# Altium PCB ZYNQ7020_AD9364.PcbDoc (part 3 of 3)
Units mil, origin at the board's own origin, x right, y up, seen from the top; angles counter-clockwise.
Board outline 6000 x 4000 mil, 4 copper layers (Top Layer, Layer 1, Layer 2, Bottom Layer), stack 13.912 mil thick; 188 components, 275 nets, 1212 pads, 269 vias.
Unrouted connection lines stored in the file: 735.
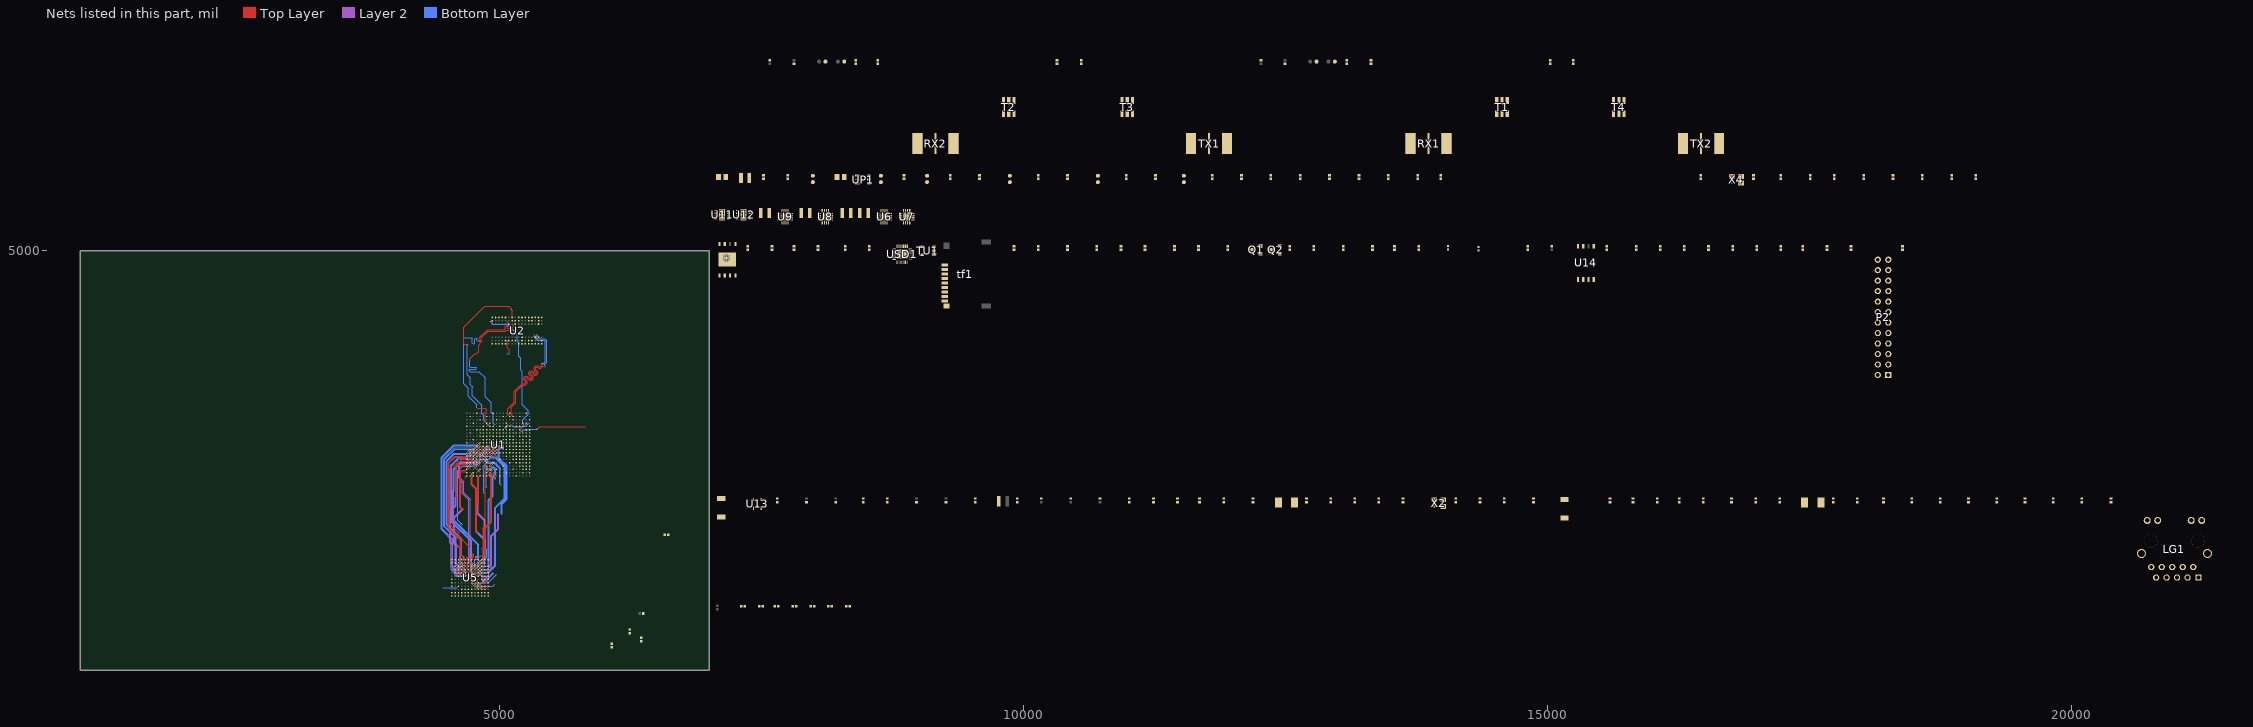
[diagram p4: the nets of this part, all layers, seen from the top]

## Via types
v1: diameter 17.72, hole 7.87, Top Layer to Bottom Layer, tented both sides, 129 vias
v2: diameter 16, hole 10, Top Layer to Bottom Layer, 124 vias
v3: diameter 19.68, hole 11.81, Top Layer to Bottom Layer, 16 vias

## Nets (pads, with @x,y where several pads share a name; then routed paths per layer and width w, separated by ;. In a path a pad name is that pad's centre, name@x,y a point inside that pad or via, vN(x,y) a via of type N, cw(c..) or ccw(c..) an arc to the next point about the centre after c; other vN are vias at no path point) (continued)
DDR3_DQS1_N: U1.F2 U2.B7 | length 1284.8
  Top Layer w6: U1.F2@5129.69,3419.29 5114.72,3434.26 5114.72,3506.84 5156.06,3548.18 5156.06,3654.47 5219.05,3717.47 5247.59,3717.47 5264.33,3734.2 5264.33,3754.87 5245.63,3773.57 5245.63,3782.43 5253.5,3790.3 5263.34,3790.3 5289.92,3763.73 5308.62,3763.73 5322.4,3777.51 5322.4,3797.19 5293.85,3825.73 5293.85,3836.56 5298.78,3841.48 5306.65,3841.48 5334.21,3813.92 5353.89,3813.92 5367.67,3827.7 5367.67,3845.42 5347,3866.09 5347,3885.77 5350.94,3889.71 5366.69,3889.71 5377.52,3878.88 5395.23,3878.88 5412.95,3896.6 v2@5429.68,3896.6 ; v2(5358.81,4191.88) 5358.81,4189.91 U2.B7@5373.58,4175.14
  Bottom Layer w6: v2(5358.81,4191.88) 5349.96,4183.02 5349.96,4175.14 5363.74,4161.36 5430.67,4161.36 5452.32,4139.71 5452.32,3934.99 5432.63,3915.3 v2@5432.63,3902.51
  other v2: 5431.65,3896.6
DDR3_DQS1_P: U1.G2 U2.C7 | length 1294.4
  Top Layer w6: U1.G2@5098.04,3419.29 5081.99,3435.34 5081.99,3493.79 5144.25,3556.05 5144.25,3659.4 5216.1,3731.25 5240.7,3731.25 5250.55,3741.09 5250.55,3749.95 5232.83,3767.66 5232.83,3790.3 5246.61,3804.08 5266.3,3804.08 5292.87,3777.51 5303.7,3777.51 5309.6,3783.41 5309.6,3790.3 5279.09,3820.81 5279.09,3839.51 5294.84,3855.26 5311.57,3855.26 5339.13,3827.7 5348.97,3827.7 5353.89,3832.62 5353.89,3841.48 5334.21,3861.17 5334.21,3890.7 5346.02,3902.51 5371.61,3902.51 5382.44,3891.68 5390.31,3891.68 5406.06,3907.43 v2(5406.06,3921.21) ; v2(5327.32,4191.88) 5327.32,4189.91 U2.C7@5342.08,4175.14
  Bottom Layer w6: v2@5330.27,4189.91 5338.15,4182.03 5338.15,4169.24 5359.8,4147.58 5425.74,4147.58 5439.52,4133.81 5439.52,3939.91 5420.82,3921.21 v2(5406.06,3921.21)
DDR3_ODT: U1.N5 U2.K1 | length 1706.2
  Top Layer w6: v2(4692.6,4103.06) 4668,4103.06 4658.15,4112.9 4658.15,4268.41 4860.91,4471.17 5091.22,4471.17 v2(5123.7,4438.69) 5121.74,4436.72 U2.K1@5121.74,4363.89 ; v2(4894.02,3338.48) 4894.34,3338.48 U1.N5@4907.91,3324.91
  Bottom Layer w6: v2@4693.59,4105.03 4694.57,4104.04 4694.57,3816.64 4722.13,3789.08 4722.13,3724.12 4743.78,3702.47 4743.43,3702.12 4743.43,3618.01 4833.98,3527.46 4833.98,3444.78 4848.75,3430.02 4848.75,3383.76 v2@4895.01,3337.5 ; v2@5123.7,4443.61 v2@5125.67,4441.64
DDR3_RAS: U1.P4 U2.J3 | length 1666.6
  Top Layer w6: v2(4783.88,3494.66) 4788.8,3499.58 4864.59,3499.58 4879.35,3484.82 4879.35,3477.93 4863.13,3458.17 4863.13,3373.17 U1.P4@4876.35,3356.03 ; v2(4829.19,4142.59) 4829.19,4169.16 4893.17,4233.14 5056.55,4233.14 5067.38,4243.97 5113.64,4243.97 5123.48,4253.81 v2(5123.48,4277.43) 5127.42,4277.43 U2.J3@5153.01,4303.02
  Bottom Layer w6: v2@4784.86,3495.64 4784.86,3532.06 4703.17,3613.75 4703.17,3685.86 4703.21,3685.89 4703.21,3686.88 4657.93,3732.15 4657.93,4160.3 4665.81,4168.18 4735.69,4168.18 4743.56,4160.3 4743.56,4119.95 4751.44,4112.08 4759.31,4112.08 4765.22,4117.98 4765.22,4159.32 4773.09,4167.19 4780.96,4167.19 4785.89,4162.27 4785.89,4148.49 4791.79,4142.59 v2@4825.26,4142.59 ; v2@5120.53,4277.43 v2@5123.48,4274.48
DDR3_RESET: R1.1 U1.B4 U2.T2 | length 1299.1
  Top Layer w6: v2(4907.89,4333.24) 4931.52,4333.24 U2.T2@4932.5,4334.23 ; v2(5239.59,3340.13) 5240.26,3340.13 U1.B4@5256.16,3356.03
  Bottom Layer w6: v2(4907.89,4333.24) 4941.36,4299.78 5071.28,4299.78 5169.7,4201.35 5169.7,4138.36 5184.22,4123.85 5184.22,3992.94 5204.15,3973 5204.15,3862.77 5218.92,3848 5218.92,3529.11 5276,3472.02 5276,3439.54 5224.57,3388.11 5224.57,3352.19 5236.63,3340.13 v2(5239.59,3340.13)
DDR3_VREF: C1.1 R4.1 R5.2 U1.H6 U1.P6 U2.H1 U2.M8
DDR3_WE: U1.M5 U2.L3 | length 1607.7
  Top Layer w6: v2(4717.97,3943.77) 4717.97,3969.36 4764.23,4015.62 4780.96,4015.62 4803.6,4038.26 4803.6,4098.3 4819.35,4114.04 4819.35,4127.82 4808.52,4138.65 4808.52,4169.16 4888.25,4248.89 5048.68,4248.89 5057.54,4257.74 5057.54,4278.41 5063.44,4284.32 5073.29,4284.32 5077.22,4280.38 5077.22,4262.67 5081.16,4258.73 5096.91,4258.73 5102.81,4264.63 5102.81,4290.23 5090.02,4303.02 5088.05,4303.02 v2(5074.27,4316.8) ; U1.M5@4939.56,3324.91 4941.48,3324.91 v2(4956.03,3339.47)
  Bottom Layer w6: v2@4718.96,3940.82 4718.96,3892.59 4723.88,3887.67 4775.06,3887.67 4779.98,3882.74 4779.98,3872.9 4775.06,3867.98 4718.96,3867.98 4715.02,3864.04 4715.02,3856.17 4722.89,3848.3 4804.59,3848.3 4864.63,3788.26 4864.63,3687.86 4864.5,3687.73 4864.5,3608.17 4924.54,3548.13 4924.54,3479.22 4924.28,3478.97 4924.28,3457.83 4941.27,3440.84 4941.27,3408.35 4941.02,3408.1 4941.02,3355.47 v2@4954.06,3342.42
EN_AGC: U1.U14 U5.G5 | length 533.3
  Top Layer w5: U5.G5@4736.59,1832.91 v1(4752.34,1817.17) ; v1@4768.58,3025.36 U1.U14@4784.06,3040.84
  Bottom Layer w5: v1(4768.58,3025.19) 4768.81,3025.19 4785,3009 4785,2985.93 4793.93,2977 4805.53,2977 4814.93,2986.39 4814.93,2998.24 4825.68,3009 4867.22,3009 4874.22,3002 4882,3002 4896.01,2987.99 4896.01,2987.94 4897.45,2986.5 4950.5,2986.5 4951.98,2985.02 5010,2927 5010,2774 5015,2769
ENABLE: U1.V15 U5.G6 | length 1398.3
  Top Layer w5: U5.G6@4736.09,1864.43 4720,1880.52 4720,2056.38 4717,2059.38 4717,2172.92 4617,2272.92 4617,2303 4533,2387 4533,2923.44 4579,2969.44 4589.56,2969.44 4614,2993.87 4737.08,2993.87 U1.V15@4752.56,3009.35
ETH_MDC: U1.C10
ETH_MDIO: R34.2 U1.C11
ETH_RXCK: U1.B17
ETH_RXCTL: R36.2 U1.D13
ETH_RXD0: R41.1 U1.D11
ETH_RXD1: R39.1 U1.A16
ETH_RXD2: R43.1 U1.F15
ETH_RXD3: R45.1 U1.A15
ETH_TXCK: U1.A19
ETH_TXCTL: U1.F14
ETH_TXD0: U1.E14
ETH_TXD1: U1.B18
ETH_TXD2: U1.D10
ETH_TXD3: U1.A17
FB_CLK_N: RX22.2 U1.U17 U5.G10 | length 1243.5
  Top Layer w5: U5.G10@4736.09,1990.42 v1(4751.83,2006.17) ; v1@4768.58,2930.88 U1.U17@4784.06,2946.36
  Layer 2 w5: v1(4751.83,2006.17) 4720.34,2037.66 4720.34,2052 4719.84,2052.49 4719.84,2628.3 4658.07,2690.07 4658.07,2797.93 4622,2834 4622,2958 4648,2984 4739.68,2984 4768.59,2955.08 v1(4768.58,2930.71)
FB_CLK_P: U1.T16 U5.F10 | length 1264.1
  Top Layer w5: v1(4688.85,2006.14) U5.F10@4704.59,1990.42 ; v1(4800.07,2962.14) 4800.07,2962.34 U1.T16@4815.55,2977.83
  Layer 2 w5: v1(4688.85,2006.14) 4709.35,2026.63 4709.35,2053.15 4709.84,2053.65 4709.84,2624.16 4648.07,2685.93 4648.07,2793.79 4612,2829.86 4612,2962.14 4643.86,2994 4743.82,2994 4775.66,2962.16 v1@4800.05,2962.16
FPGA_DONE: Q1.1 U1.R11 | length 21.9
  Top Layer w14: v1@4831.57,3120.03 U1.R11@4847.05,3135.51
  other v1: 4831.57,3119.85
FPGA_TCK: P2.10 U1.F9
FPGA_TDI: P2.8 U1.G6
FPGA_TDO: P2.7 U1.F6
FPGA_TMS: P2.9 U1.J6
GND: *.4 *.9 C1.2 C109.1 C110.1 C111.2 C112.2 C113.1 C114.1 C115.1 C116.1 C117.2 C118.2 C119.1 C120.2 C121.1 C122.2 C123.2 C124.2 C125.2 C126.2 C127.1 C128.1 C129.2 C130.1 C131.1 C132.2 C133.2 C134.2 C135.2 C136.2 C137.2 C138.2 C139.2 C140.1 C141.2 LG1.12 LG1.P10 LG1.SHIELD0 LG1.SHIELD1 P2.3 P2.5 P2.18 P2.19 P2.20 P2.21 P2.22 P2.23 P2.24 Q1.2 Q2.2 R1.2 R2.1 R5.1 R6.2 R26.2 R28.2 R36.1 R40.1 R44.2 R49.1 R51.1 R53.1 R54.2 R56.1 R62.1 R65.2 R69.2 RESET.1 RX6.2 RX7.2 RX8.2 RX13.2 RX14.2 RX15.2 tf1.6 tf1.10 TU1.2 U1.A8 U1.A18 U1.B1 U1.B11 U1.C4 U1.C9 U1.C14 U1.D17 U1.E10 U1.E20 U1.F3 U1.F7 U1.F10 U1.G10 U1.G12 U1.G16 U1.H7 U1.H9 U1.H11 U1.H13 U1.H19 U1.J2 U1.J8 U1.J10 U1.J12 U1.K5 U1.K7 U1.K10 U1.K11 U1.K13 U1.K15 U1.L8 U1.L9 U1.L12 U1.L18 U1.M1 U1.M7 U1.M9 U1.M10 U1.M11 U1.M13 U1.N4 U1.N8 U1.N10 U1.N12 U1.N14 U1.P7 U1.P9 U1.P11 U1.P13 U1.P17 U1.R8 U1.R12 U1.R20 U1.T3 U1.T7 U1.T13 U1.U6 U1.U16 U1.V9 U1.V19 U1.W2 U1.W12 U1.Y5 U1.Y15 U2.A9 U2.B1 U2.B3 U2.B9 U2.D1 U2.D8 U2.E1 U2.E2 U2.E8 U2.F9 U2.G1 U2.G8 U2.G9 U2.J2 U2.J8 U2.M1 U2.M9 U2.P1 U2.P9 U2.T1 U2.T9 U6.6 U6.7 U6.8 U6.15 U6.16 U6.20 U7.6 U7.7 U7.8 U7.15 U7.16 U7.20 U8.6 U8.7 U8.8 U8.15 U8.16 U8.20 U9.6 U9.7 U9.8 U9.15 U9.16 U9.20 U13.1 U14.4 USD1.2 USD1.11 USD1.25 USR_BTN.1 X2.2 | length 321.4
  Top Layer w14: v1(4634,3009) 4689.04,3009 U1.Y15@4689.57,3009.53 ; v1@4705.58,3088.54 U1.W12@4721.06,3104.02 ; v1(4737.08,2866.06) 4737.08,2867.07 4752.56,2882.55 U1.V19@4752.56,2883.54 ; v1@4800.07,3056.86 U1.T13@4815.55,3072.34 ; v1@4831.57,3088.54 U1.R12@4847.05,3104.02 ; v1@4863.06,2931.06 U1.P17@4878.54,2946.54 ; v1@4863.06,3120.03 U1.P11@4878.54,3135.51 ; v1(4863.22,3056.7) 4863.22,3057.2 U1.P13@4878.54,3072.52 ; v1@4894.56,3025.54 U1.N14@4910.04,3041.02 ; v1(4894.72,3088.2) 4894.72,3088.7 U1.N12@4910.04,3104.02 ; v1@4926.06,3057.04 U1.M13@4941.54,3072.52 ; v1(4926.21,3119.64) 4926.21,3120.18 U1.M11@4941.54,3135.51 ; v1@4957.55,3088.54 U1.L12@4973.03,3104.02
  other v1: 4863.06,2930.88 4894.56,3025.36 4800.07,3056.69 4926.06,3056.86 4705.58,3088.36 4831.57,3088.36 4957.55,3088.36 4863.06,3119.85
NetC6_2: U6.9
NetC7_2: U7.9
NetC11_2: U8.9
NetC13_2: U9.9
NetC19_1: U11.3
NetC24_1: U12.3
NetC27_2: U11.6
NetC28_2: U12.6
NetC111_1: C111.1 C112.1 LG1.P1
NetC117_1: C117.1 X1.1
NetC118_1: C118.1 X1.2
NetC119_2: C119.2 R28.1 R29.1 U1.E11
NetC122_1: C122.1 X3.1
NetC123_1: C123.1 X3.2
NetC129_1: C129.1
NetC135_1: C135.1 C136.1 R64.1
NetC142_1: C142.1 R73.2
NetC145_2: C145.2 R74.1
NetC146_2: C146.2 R73.1 U5.G2 U5.G3
NetC150_2: C150.2 C152.1 U5.M12
NetC151_2: C151.2 R74.2 U5.A11 U5.B11
NetC152_2: C152.2 X4.3
NetCP2_2: CP2.2 RP1.1 RP2.2 UP1.6
NetDONE_2: DONE.2 R61.2
NetL1_1: L1.1 U6.1 U6.2 U6.3
NetL2_1: L2.1 U7.1 U7.2 U7.3
NetL3_1: L3.1 U8.1 U8.2 U8.3
NetL4_1: L4.1 U9.1 U9.2 U9.3
NetLG1_11: LG1.11 R32.2
NetLG1_13: LG1.13 R31.2
NetLP1_1: LP1.1 UP1.3
NetP2_2: P2.2 R52.1 R54.1
NetP2_4: P2.4 R48.2 R50.1
NetQ1_3: Q1.3 R61.1
NetQ2_3: Q2.3 R60.1
NetR2_2: R2.2 U1.H5 | length 61
  Top Layer w6: U1.H5@5066.17,3324.91 5066.17,3325.58 v2(5081.03,3340.45)
  Bottom Layer w12: 5057.41,3307.97 5057.41,3313.88 v2@5081.03,3337.5
NetR3_2: R3.2 U1.G5 | length 214.3
  Top Layer w6: U1.G5@5097.82,3324.91 5097.97,3324.91 v2(5113.51,3340.45)
  Bottom Layer w6: v2(5113.51,3340.45) 5113.51,3338.48 5130.24,3321.75 5219.57,3321.75 5221.84,3324.02 5251.61,3324.02 5275.91,3348.32 5275.91,3358.17
NetR6_1: R6.1 U2.L8 | length 161.3
  Top Layer w6: U2.L8@5090,4142.5 5087.05,4142.5 5075.24,4130.69 5075.24,4072.62 5093.94,4053.92 v2(5093.94,4020.46)
  Bottom Layer w6: 5068.35,4018.49 v2@5091.97,4018.49
NetR9_2: U6.5
NetR10_2: U7.5
NetR14_2: U8.5
NetR15_2: U9.4
NetR16_2: U9.5
NetR26_1: R26.1
NetR27_1: R27.1
NetR30_2: R30.2 U1.B10
NetR37_2: R37.2 X2.3
NetR38_2: R38.2
NetR42_2: R42.2
NetR44_1: R44.1
NetR55_2: R55.2 U1.R10
NetR57_2: R57.2 U1.L6
NetR60_2: R60.2 USR_LED.2
NetR62_2: R62.2 USD1.24
NetR63_2: R63.2 tf1.3 USD1.20
NetR67_2: R67.2 TU1.1
NetR68_1: R68.1 TU1.3
NetR70_1: R70.1 tf1.9
NetR72_1: R72.1 USD1.9
NetR75_1: R75.1 U5.L4 | length 22.3
  Top Layer w12: U5.L4@4862.06,1801.47 v1(4877.81,1785.72)
NetRESET_2: RESET.2 U13.3
NetRX1_1: RX1.1 T1.3
NetRX2_1: RX2.1 T2.3
NetT3_3: T3.3 TX1.1
NetT4_3: T4.3 TX2.1
Nettf1_1: tf1.1 USD1.23
Nettf1_2: tf1.2 USD1.22
Nettf1_5: tf1.5 USD1.19
Nettf1_7: tf1.7 USD1.18
Nettf1_8: tf1.8 USD1.16
OTG_CLK: R42.1 U1.A11
OTG_DATA0: U1.A14
OTG_DATA1: U1.D15
OTG_DATA2: U1.A12
OTG_DATA3: U1.F12
OTG_DATA4: U1.C16
OTG_DATA5: U1.A10
OTG_DATA6: U1.E13
OTG_DATA7: U1.C18
OTG_DIR: U1.C13
OTG_NXT: U1.E16
OTG_RESETN: C121.2 R33.1 U1.D16
OTG_STP: U1.C15
PG_1V0: U6.4 U7.13
PG_1V5: U8.4 U9.13
PG_1V8: U7.4 U8.13
PHY_AD0/LED0: R31.1 R46.2
PHY_AD1/LED1: R32.1 R40.2
PHY_MDI0_N: LG1.P3
PHY_MDI0_P: LG1.P2
PHY_MDI1_N: LG1.P7
PHY_MDI1_P: LG1.P4
PHY_MDI2_N: LG1.P6
PHY_MDI2_P: LG1.P5
PHY_MDI3_N: LG1.P9
PHY_MDI3_P: LG1.P8
PMEB: R35.2
PS_CLK_500: R37.1 U1.E7
PS_MIO7: R56.2 U1.D8
PS_MIO8: R47.2 U1.D5 | length 685.1
  Top Layer w6: U1.D5@5192.77,3324.91 5208.98,3308.7 v2@5208.98,3277.46 ; v2@5362.53,3298.13 v2(5362.53,3299.11) 5385.32,3321.91 5820.05,3321.91
  Bottom Layer w6: v2(5208.98,3279.02) 5217.85,3279.02 5233.85,3295.02 5247.11,3295.02 5249.91,3292.22 5297.57,3292.22 5301.5,3296.16 v2@5362.53,3296.16
PS_PRO_B: U1.C7 U13.2
QSPI_CS: *.1 R59.1 U1.A7 U14.1
QSPI_D0: *.5 R49.2 U1.B8 U14.5
QSPI_D1: *.2 R51.2 U1.D6 U14.2
QSPI_D2: *.3 R52.2 U1.B7 U14.3
QSPI_D3: *.7 R50.2 U1.A6 U14.7
QSPI_SCK: R53.2 R58.2 U1.A5
REG_OUT: L6.1
RFGND: C14.2 C15.2 C58.2 C59.1 C60.2 C63.1 C142.2 C143.1 C144.1 C145.1 C146.1 C150.1 C151.1 C162.2 C165.2 C166.2 C168.2 C169.2 C170.2 C171.2 C172.2 C173.2 C174.2 C175.2 C176.2 C177.2 CP1.1 CP3.1 R75.2 RP1.2 RX1.2 RX1.3 RX1.4 RX1.5 RX2.2 RX2.3 RX2.4 RX2.5 RX5.1 RX6.1 RX7.1 RX8.1 RX10.1 RX13.1 RX14.1 RX15.1 RX22.1 T1.1 T1.2 T1.5 T2.1 T2.2 T2.5 T3.1 T3.2 T3.5 T4.1 T4.2 T4.5 TX1.2 TX1.3 TX1.4 TX1.5 TX2.2 TX2.3 TX2.4 TX2.5 U5.A1 U5.A2 U5.A4 U5.A5 U5.A6 U5.A12 U5.B1 U5.B2 U5.B12 U5.C1 U5.C2 U5.C7 U5.C8 U5.C9 U5.C10 U5.C11 U5.C12 U5.D1 U5.D12 U5.E1 U5.F1 U5.F3 U5.F7 U5.F9 U5.F11 U5.G1 U5.G12 U5.H2 U5.H3 U5.H5 U5.H6 U5.H7 U5.H10 U5.J2 U5.K1 U5.K2 U5.K12 U5.L1 U5.L2 U5.L3 U5.L7 U5.L8 U5.L9 U5.L10 U5.L11 U5.L12 U5.M4 U5.M5 U5.M6 U11.0 U11.4 U12.0 U12.4 UP1.2 X4.2 | length 299.8
  Top Layer w12: v1(4594.36,1911.65) U5.C7@4610.1,1895.93 ; v1(4594.36,1943.14) U5.C8@4610.1,1927.42 ; v1(4595,1974) U5.C9@4610.1,1958.92 ; v1(4641.1,2073.89) 4641.35,2073.64 4641.35,2053.66 U5.D12@4641.6,2053.41 ; v1(4688.84,1911.68) U5.F7@4704.59,1895.93 ; v1(4688.84,1974.67) U5.F9@4704.59,1958.92 ; v1(4688.85,2037.63) U5.F11@4704.59,2021.91 ; U5.G12@4736.09,2053.41 4736.09,2065.09 4750,2079 v1(4750,2105) ; U5.H5@4767.58,1832.94 v1(4783.33,1817.19) ; U5.H6@4767.58,1864.43 v1(4783.33,1848.68) ; U5.H7@4767.58,1895.93 v1(4783.33,1911.68) ; U5.H10@4767.58,1990.42 v1(4783.33,2006.17)
  other v3: 7112.2,5306.61 7137.8,5306.61 7317.2,5306.61 7342.8,5306.61 7112.2,5332.2 7137.8,5332.2 7317.2,5332.2 7342.8,5332.2 7112.2,5357.8 7137.8,5357.8 7317.2,5357.8 7342.8,5357.8 7112.2,5383.39 7137.8,5383.39 7317.2,5383.39 7342.8,5383.39
RX1A_N: C16.2 U5.M2
RX1A_P: C30.2 U5.M1
RX1AN_N: C16.1 T1.6
RX1AN_P: C30.1 T1.4
RX1B_N: C29.2 U5.J1
RX1B_P: C31.2 U5.H1
RX1BN_N: C29.1 T2.6
RX1BN_P: C31.1 T2.4
RX_D0_N: U1.P20 U5.K11 | length 933.6
  Top Layer w5: U5.K11@4830.58,2021.91 4846.58,2037.91 4846.58,2088.53 4865.09,2107.03 4865.09,2350.09 4927,2412 4927,2858 4919,2866 4900,2866 4892,2858 4886.87,2858 4880.92,2852.05 U1.P20@4878.54,2852.05
RX_D0_P: U1.N20 U5.J12 | length 856.4
  Top Layer w5: U5.J12@4799.08,2053.41 4800.26,2054.59 4800.26,2066.73 4824.09,2090.55 4834.46,2090.55 4855.09,2111.18 4855.09,2354.23 4917,2416.14 4917,2842.71 4910.04,2849.67 U1.N20@4910.04,2852.05
RX_D1_N: U1.W20 U5.K10 | length 969.6
  Top Layer w5: U1.W20@4721.06,2852.05 4731.81,2841.3 4731.81,2770.05 4769.93,2731.93 4775,2726.86 4775,2315.86 4785.93,2304.93 ; U5.K10@4830.58,1990.42 v1(4846.33,2006.17)
  Bottom Layer w5: 4782.14,2327 4785.07,2324.07 4869.46,2239.68 4869.46,2155.44 4877.58,2147.32 4877.58,2076.09 4846.33,2044.84 v1(4846.33,2006.17)
RX_D1_P: U1.V20 U5.J11 | length 919.7
  Top Layer w5: U1.V20@4752.56,2852.05 4741.81,2841.3 4741.81,2774.19 4785,2731 4785,2320 4793,2312 ; U5.J11@4799.08,2021.91 4814.58,2037.43 v1(4814.94,2037.45)
  Bottom Layer w5: 4778,2317 4859.46,2235.54 4859.46,2155.44 4845.94,2141.91 4845.94,2068.45 v1(4814.94,2037.45)
RX_D2_N: U1.U20 U5.K9 | length 967
  Top Layer w5: U1.U20@4784.06,2852.05 4794.81,2841.31 4794.81,2577 ; U5.K9@4830.58,1958.92 4831.04,1958.92 4846.33,1974.21 v1(4846.33,1974.29)
  Layer 2 w5: 4789,2600 4798.07,2590.93 4798.07,2497.07 4865.54,2429.6 4865.54,2048.88 4862.34,2045.68 4862.34,1990.3 v1(4846.33,1974.29)
RX_D2_P: U1.T20 U5.J10 | length 947.1
  Top Layer w5: U5.J10@4799.08,1990.95 4814.83,2006.69 v1(4814.94,2006.69) ; 4804.81,2577 4804.81,2841.31 U1.T20@4815.55,2852.05
  Layer 2 w5: 4781.93,2592.93 4788.07,2586.79 4788.07,2492.93 4791,2490 4855.54,2425.46 4855.54,2053.28 4852.61,2050.36 4852.34,2050.36 4852.34,2024.45 4849.42,2021.53 4829.77,2021.53 v1(4814.94,2006.69)
RX_D3_N: U1.P19 U5.K8 | length 1181.5
  Top Layer w5: U5.K8@4830.58,1927.42 v1(4846.33,1943.17) ; U1.P19@4878.54,2883.54 4878.54,2884.04 4894,2899.5 v1(4894,2900)
  Bottom Layer w5: v1(4846.33,1943.17) 4862.34,1959.18 4883.94,1959.18 4903.34,1978.58 4903.34,2620.74 4942.14,2659.54 4942.14,2840.78 4965.5,2864.14 4965.5,2917.21 4944.71,2938 4930,2938 4917.76,2925.76 4915.7,2925.76 4905.75,2915.8 4905.75,2908.14 4902.82,2905.21 4902.65,2905.21 4897.44,2900 v1(4894,2900)
RX_D3_P: U1.N18 U5.J9 | length 1148.4
  Top Layer w5: U5.J9@4799.08,1958.92 4814.83,1974.66 v1(4814.94,1974.66) ; U1.N18@4910.04,2915.04 4910.95,2915.04 4925.09,2900.9 v1(4926,2900.9)
  Bottom Layer w5: v1(4814.94,1974.66) 4830.45,1990.18 4889.07,1990.18 4893.34,1994.45 4893.34,2624.88 4932.14,2663.68 4932.14,2844.93 4956,2868.78 4956,2869.5 4955.5,2870 4955.5,2913.07 4940.57,2928 4934.14,2928 4923.4,2917.26 4919.22,2917.26 4914.25,2912.28 4914.25,2908.14 4917.18,2905.21 4918.25,2905.21 4922.56,2900.9 v1(4926,2900.9)
RX_D4_N: U1.T15 U5.K7 | length 1677.5
  Top Layer w5: v1@4800.07,2993.87 U1.T15@4815.55,3009.35 ; U5.K7@4830.58,1896.45 v1(4846.33,1912.2)
  Layer 2 w5: v1(4846.33,1912.2) 4861.86,1927.73 4883.6,1927.73 4920.34,1964.48 4920.34,1981.35 4928.09,1989.09 4928.09,2275 4995,2341.91 4995,2490
  Bottom Layer w5: v1(4800.07,2993.7) 4800.07,2996.23 4816.71,3012.87 4816.71,3033.16 4826.4,3042.85 4836.88,3042.85 4847.29,3053.26 4847.29,3061.79 4857.65,3072.15 4867.86,3072.15 4878.2,3082.49 4878.2,3094.65 4888.54,3104.99 4900.71,3104.99 4910.36,3114.64 4910.36,3124.86 4922.93,3137.43 4976.57,3137.43 4983,3131 4988,3126 4988,3018.33 5063.5,2942.83 5063.5,2632.3 5016,2584.8 5016,2491.86 5021.86,2486 5026,2486
RX_D4_P: U1.T14 U5.J8 | length 1663.6
  Top Layer w5: U5.J8@4799.08,1927.95 4814.83,1943.69 v1(4814.94,1943.69) ; v1@4800.07,3025.36 U1.T14@4815.55,3040.84
  Layer 2 w5: v1(4814.94,1943.69) 4829.8,1958.55 4883.4,1958.55 4918.09,1993.24 4918.09,2279.14 4985,2346.06 4985,2490
  Bottom Layer w5: v1(4800.07,3025.19) 4800.07,3027.83 4806.71,3034.47 4806.71,3038.39 4815.86,3047.55 4815.86,3063.86 4824.57,3072.57 4840.35,3072.57 4848.2,3080.41 4848.2,3094.52 4856.9,3103.22 4871.01,3103.22 4879.7,3111.91 4879.7,3126.01 4894.69,3141 4912.36,3141 4918.79,3147.43 4980.71,3147.43 4998,3130.14 4998,3021.77 4998.51,3021.26 4999.21,3021.26 5073.5,2946.98 5073.5,2628.16 5026,2580.66 5026,2496
RX_D5_N: U1.R14 U5.J7 | length 1505.6
  Top Layer w5: U5.J7@4799.58,1896.45 v1(4815.33,1912.2) ; v1@4831.57,3025.36 U1.R14@4847.05,3040.84
  Bottom Layer w5: v1(4815.33,1912.2) 4830.82,1896.7 4883.6,1896.7 4897.22,1910.32 4897.22,1928.08 4965.57,1996.44 4965.57,2546.4 5055,2635.82 5055,2939.31 4979.5,3014.81 4979.5,3017.64 4963.14,3034.01 4916.2,3034.01 4915.02,3035.19 4909.42,3035.19 4904.38,3040.22 4846.6,3040.22 v1(4831.57,3025.19)
RX_D5_P: U1.P14 U5.H8 | length 1456.4
  Top Layer w5: U5.H8@4768.08,1927.95 v1(4783.83,1943.69) ; v1@4863.06,3025.36 U1.P14@4878.54,3040.84
  Bottom Layer w5: v1(4783.83,1943.69) 4799.82,1927.7 4882.7,1927.7 4955.57,2000.58 4955.57,2550.54 5045,2639.96 5045,2935.17 4969.5,3010.67 4969.5,3013.5 4958.99,3024.01 4914.21,3024.01 4900.71,3010.5 4877.74,3010.5 v1(4863.06,3025.19)
RX_FRAME_N: U1.V13 U5.G7 | length 1448.6
  Top Layer w5: U5.G7@4735.58,1895.45 v1@4751.33,1911.2 ; v1@4737.08,3056.86 U1.V13@4752.56,3072.34
  Bottom Layer w5: v1(4737.08,3056.69) 4737.08,3054.06 4722.22,3039.2 4722.22,3027.13 4709.61,3014.53 4696.47,3014.53 4677,3034 4674,3037 4618.86,3037 4538,2956.14 4538,2650 4537,2649 4537,2417.32 4726,2228.32 4726,1933.88 4736.18,1923.7 4742.84,1923.7 4745.77,1920.77 4745.77,1920.7 4750.58,1915.89 v1(4750.58,1912.45)
RX_FRAME_P: U1.U13 U5.G8 | length 1458.7
  Top Layer w5: U5.G8@4735.58,1926.95 v1@4751.33,1942.69 ; v1@4768.58,3056.86 U1.U13@4784.06,3072.34
  Bottom Layer w5: v1@4751.33,1942.69 4751.33,1939.76 4746.77,1935.2 4746.77,1935.13 4743.84,1932.2 4739.7,1932.2 4734.5,1937.4 4734.5,1951.86 4736,1953.36 4736,2097.99 4735.14,2098.85 4735.14,2164.72 4736,2165.58 4736,2232.46 4547,2421.46 4547,2644.86 4548,2645.86 4548,2952 4623,3027 4659.93,3027 4660,3026.93 4669.93,3026.93 4692.33,3004.53 4737.26,3004.53 4751.94,3019.21 4751.94,3040.04 v1(4768.58,3056.69)
  other v1: 4751.58,1943.45
SD_CD: R70.2 R71.1 U1.B14
SD_CLK: R72.2 U1.D14
SD_CMD: U1.C17 USD1.4
SD_D0: U1.E12 USD1.6
SD_D1: U1.A9 USD1.7
SD_D2: U1.F13 USD1.1
SD_D3: U1.B15 USD1.3
SPI_CLK: U1.P18 U5.J5 | length 989.3
  Top Layer w5: U5.J5@4799.08,1833.93 4799.08,1833.42 v1(4815.69,1816.81) ; 4827,2155 4845.03,2173.03 4845.03,2356.19 4863.06,2374.22 4863.06,2899.38 U1.P18@4878.54,2914.86
  Layer 2 w5: v1(4815.69,1816.81) 4815.69,1819.05 4830.82,1834.18 4850.1,1834.18 4862.34,1846.42 4862.34,1862.69 4881.57,1881.92 4891.57,1881.92 4941.34,1931.69
SPI_DI: U1.P15 U5.J4 | length 518
  Top Layer w5: U5.J4@4800.07,1801.43 4800.07,1801.29 4815.3,1786.06 v1(4815.66,1786.06) ; v1(4862.35,2992.86) v1@4863.37,2993.87 ; v1@4863.38,2993.87 4878.54,3009.03 U1.P15@4878.54,3009.35
  Layer 2 w5: v1(4815.66,1786.06) 4816.2,1786.06 4831.57,1801.43 4942.04,1801.43 4958.14,1817.53
  Bottom Layer w5: v1(4862.35,2992.86) 4863.9,2992.86 4865.82,2990.94 4878.06,2990.94 4894,2975 4917.67,2975 4920.67,2978 4946,2978 5001.5,2922.5 5001.5,2776
SPI_DO: U1.P16 U5.L6 | length 434
  Top Layer w5: U5.L6@4862.07,1865.43 4878.08,1849.42 v1(4878.08,1848.79) ; v1@4863.06,2962.37 U1.P16@4878.54,2977.85
  Bottom Layer w5: 4855,2688 4851,2692 4851,2914 4847,2918 4847,2946.14 v1(4863.06,2962.2) ; v1(4878.08,1848.79) 4879.34,1850.05 4879.34,1858.69 4946.01,1925.36
SPI_ENB: U1.N17 U5.K6 | length 309.9
  Top Layer w5: U5.K6@4830.58,1865.43 4830.58,1865.17 4844.85,1850.9 v1(4845.1,1850.9) ; v1@4894.56,2930.88 U1.N17@4910.04,2946.36
  Layer 2 w5: v1(4845.1,1850.9) 4846.32,1852.12 4846.32,1884.16 4854.59,1892.43 4879.84,1892.43
  Bottom Layer w5: 4879,2743 4876,2746 4876,2912.15 v1(4894.56,2930.71)
TEST/ENABLE: RX5.2 U5.C4 | length 156.9
  Top Layer w5: v1(4594.09,1785.43) U5.C4@4609.84,1801.18
  Bottom Layer w5: 4459.42,1785.43 v1(4594.09,1785.43)
TX1A_N: C48.1 L9.2 U5.M8
TX1A_P: C40.1 L8.2 U5.M7
TX1B_N: C47.1 L7.2 U5.M10
TX1B_P: C32.1 L5.2 U5.M9
TX1BN_N: C47.2 C48.2 T3.6 T4.6
TX1BN_P: C32.2 C40.2 T3.4 T4.4
TX_D0_N: U1.T10 U5.E7 | length 1729.7
  Top Layer w5: v1(4657.59,1911.82) 4657.59,1911.62 4673.09,1896.11 U5.E7@4673.1,1895.93 ; v1@4800.07,3151.53 U1.T10@4815.55,3167.01
  Bottom Layer w5: v1(4657.59,1911.82) 4657.44,1911.67 4657.35,1911.67 4641.85,1896.18 4587.34,1896.18 4575.68,1907.83 4575.68,1924.83 4543.34,1957.18 4543.34,2245.66 4456,2333 4445.43,2343.57 4445.43,2489.57 4444,2491 4444,3028.14 4566.82,3150.97 4774.1,3150.97 4784.57,3140.5 4791.93,3140.5 4800.07,3148.63 v1(4800.07,3151.35)
TX_D0_P: U1.T11 U5.F8 | length 1709.2
  Top Layer w5: v1@4688.84,1943.17 U5.F8@4704.59,1927.42 ; v1@4800.07,3120.03 U1.T11@4815.55,3135.51
  Bottom Layer w5: v1@4688.84,1943.17 4672.85,1927.18 4631.24,1927.18 4630.9,1927.52 4618.59,1927.52 4618.25,1927.18 4587.48,1927.18 4553.34,1961.32 4553.34,2249.8 4455.43,2347.71 4455.43,2493.71 4454,2495.14 4454,3024 4570.97,3140.97 4769.96,3140.97 4780.43,3130.5 4791.72,3130.5 4800.07,3122.15 v1(4800.07,3119.85)
  other v1: 4688.59,1943.42
TX_D1_N: U1.Y17 U5.D7 | length 1342.2
  Top Layer w5: 4593,2649 4593,2937.28 4613,2957.28 4678.83,2957.28 U1.Y17@4689.57,2946.54 ; v1(4624.75,1911.14) 4626.88,1911.14 U5.D7@4642.09,1895.92
  Layer 2 w5: 4590.07,2645.93 4589.68,2645.54 4589.68,2569.18 4535.15,2514.65 4535.15,2219 4553,2201.15 4553,1994.05 4588.77,1958.28 4663.74,1958.28 4672.45,1949.57 4672.45,1905.66 4663.74,1896.96 4638.93,1896.96 v1(4624.75,1911.14)
TX_D1_P: U1.Y16 U5.E8 | length 1283.4
  Top Layer w5: 4583,2653 4583,2941.43 4608.86,2967.28 4678.83,2967.28 U1.Y16@4689.57,2978.03 ; v1@4657.84,1943.17 U5.E8@4673.59,1927.42
  Layer 2 w5: 4583,2653 4579.68,2649.68 4579.68,2573.32 4525.15,2518.79 4525.15,2214.86 4543,2197.01 4543,1989.91 4579.5,1953.41 4579.5,1936.98 4588.81,1927.68 4641.85,1927.68 v1(4657.59,1943.42)
TX_D2_N: U1.U12 U5.D8 | length 1534.3
  Top Layer w5: v1(4626.78,1942.53) 4626.78,1942.39 4641.61,1927.55 U5.D8@4641.6,1927.42 ; v1(4769.61,3089.4) 4769.61,3089.49 4784.06,3103.93 U1.U12@4784.06,3104.02
  Bottom Layer w5: v1(4626.78,1942.53) 4610.55,1958.76 4610.55,1982.86 4580.57,2012.84 4580.57,2164.48 4580.72,2164.63 4580.72,2260 4471,2369.72 4471,3016.14 4573.86,3119 4741.24,3119 4769.61,3090.63 v1(4769.61,3089.4)
TX_D2_P: U1.T12 U5.E9 | length 1553.5
  Top Layer w5: v1@4657.36,1974.64 U5.E9@4673.1,1958.92 ; v1@4800.07,3088.54 4800.16,3088.54 4815.55,3103.93 U1.T12@4815.55,3104.02
  Bottom Layer w5: 4622.43,1989.5 4618.05,1989.5 4590.57,2016.98 4590.57,2160.34 4590.72,2160.48 4590.72,2264.14 4481,2373.86 4481,3012 4578,3109 4737.1,3109 4742.88,3103.22 4743.23,3103.22 4751.94,3094.52 4751.94,3086.06 4763.46,3074.54 4784.05,3074.54 4797.87,3088.36 v1(4800.07,3088.36) ; 4622.43,1990 4641,1990 4656.36,1974.64 v1@4657.36,1974.64
  other v1: 4657.11,1973.89
TX_D3_N: U1.Y19 U5.D9 | length 1075.5
  Top Layer w5: v1(4625.91,1974.64) U5.D9@4641.6,1958.92 ; 4652.93,2545.07 4644.86,2545.07 4632.93,2557 4632.93,2890.31 4636.91,2894.29 4678.82,2894.29 U1.Y19@4689.57,2883.54
  Layer 2 w5: v1(4625.91,1974.64) 4594.26,2006.29 4594.26,2176.25 4564.81,2205.7 4564.81,2456.95 4652.93,2545.07
TX_D3_P: U1.Y18 U5.E10 | length 1077.8
  Top Layer w5: 4652.93,2535.07 4640.72,2535.07 4622.93,2552.86 4622.93,2894.45 4632.77,2904.29 4636.91,2904.29 4678.82,2904.29 U1.Y18@4689.57,2915.04 ; v1(4657.36,2006.14) U5.E10@4673.1,1990.42
  Layer 2 w5: v1(4657.36,2006.14) 4626.24,2037.26 4626.24,2159.1 4577.79,2207.55 4577.74,2207.55 4574.81,2210.48 4574.81,2452.81 4660,2538
TX_D4_N: U1.W13 U5.D10 | length 1340.9
  Top Layer w5: v1(4625.71,2005.51) 4626.1,2005.51 4641.19,1990.42 U5.D10@4641.6,1990.42 ; v1@4705.58,3056.86 U1.W13@4721.06,3072.34
  Bottom Layer w5: v1(4625.71,2005.51) 4625.84,2005.64 4625.84,2088.84 4632.5,2095.5 4632.5,2247.86 4494,2386.36 4494,2996.14 4565.86,3068 4691.79,3068 4703.11,3056.69 v1(4705.58,3056.69)
TX_D4_P: U1.V12 U5.E11 | length 1363
  Top Layer w5: v1@4658.33,2036.67 U5.E11@4673.1,2021.91 ; v1@4737.08,3088.54 U1.V12@4752.56,3104.02
  Bottom Layer w5: v1@4658.33,2036.67 4658.33,2079.67 4642.5,2095.5 4642.5,2252 4504,2390.5 4504,2992 4570,3058 4681.42,3058 4687,3052.42 4687,3051 4697,3041 4712,3041 4721.45,3050.45 4721.45,3072.65 4737.08,3088.27 v1(4737.08,3088.36)
  other v1: 4657.59,2038.42
TX_D5_N: U1.Y14 U5.D11 | length 1219
  Top Layer w5: U5.D11@4640.59,2022.42 4625.33,2037.68 4625.33,2238.43 4513,2350.76 4513,2979.91 4573.02,3039.93 4644.42,3039.93 4651.82,3032.53 4682.25,3032.53 4689.57,3039.85 U1.Y14@4689.57,3041.02
TX_D5_P: U1.W14 U5.E12 | length 1215.7
  Top Layer w5: U5.E12@4673.1,2053.41 4673.1,2054.18 4663.23,2064.05 4663.23,2072.77 4635.33,2100.67 4635.33,2242.57 4523,2354.9 4523,2975.76 4577.16,3029.93 4640.28,3029.93 4647.68,3022.53 4690.19,3022.53 4707,3039.34 4719.38,3039.34 U1.W14@4721.06,3041.02
TX_FRAME_N: RX10.2 U1.W16 U5.H9 | length 1285
  Top Layer w5: v1@4705.58,2962.37 U1.W16@4721.06,2977.85 ; U5.H9@4767.58,1958.92 v1(4783.33,1974.67)
  Bottom Layer w5: v1(4705.58,2962.2) 4708.09,2962.2 4716.33,2970.44 4716.33,2974.58 4712.35,2978.55 4698.8,2978.55 4687.32,2967.07 4620.07,2967.07 4568,2915 4568,2711.25 4566.5,2709.75 4566.5,2432.8 4801.72,2197.59 4801.72,2063.32 4799.09,2060.69 4799.09,2021.91 4799.34,2021.66 4799.34,1990.68 v1(4783.33,1974.67)
TX_FRAME_P: U1.V16 U5.G9 | length 1331
  Top Layer w5: U5.G9@4736.09,1958.92 v1(4751.83,1974.67) ; v1@4737.08,2962.37 U1.V16@4752.56,2977.85
  Bottom Layer w5: v1(4737.08,2962.2) 4734.57,2962.2 4726.33,2970.44 4726.33,2978.72 4716.5,2988.55 4694.66,2988.55 4683.18,2977.07 4615.93,2977.07 4558,2919.14 4558,2715.39 4556.5,2713.89 4556.5,2428.66 4791.72,2193.45 4791.72,2067.47 4783.27,2059.02 4776.17,2059.02 4767.34,2050.18 4767.34,1990.18 v1(4751.83,1974.67)
TXNRX: U1.U15 U5.H4 | length 1039
  Top Layer w5: U5.H4@4768.58,1801.43 4768.94,1801.43 4784.08,1786.29 v1(4784.94,1786.29) ; v1@4768.58,2993.87 U1.U15@4784.06,3009.35
  Bottom Layer w5: v1(4640,2390) 4603,2427 4603,2901 4648,2946 4744,2946 4768.58,2970.58 v1(4768.58,2993.7) ; v1(4784.94,1786.29) 4800.33,1801.69 4800.33,1823.75 4810.01,1833.43 4892.08,1833.43 4968,1909.35 4968,1913
UART_RX: P2.11 U1.C12
UART_TX: P2.12 U1.B12
USB2_5V: C137.1 P2.15 R64.2 R66.1 R67.1
USB_ID: 
USB_OTG_N: P2.16
USB_OTG_P: P2.17
USB_VBUS: R66.2
USR_BTN: R19.2 U1.C5 USR_BTN.2
USR_LED: Q2.1 R65.1 U1.C8
VCC1P8: C143.2 C144.2 CP2.1 CP3.2 LP1.2 RP2.1 U5.H12 X4.4 | length 29.4
  Top Layer w10: U5.H12@4767.58,2053.41 4767.58,2054.49 4775.38,2062.29 4775.38,2077.52 v1@4775.76,2077.91
  Top Layer w12: v1@4775.76,2077.91 v1(4776.86,2079)
VCC_1V0: L1.2 U1.G7 U1.G11 U1.G13 U1.H10 U1.H12 U1.J7 U1.J13 U1.K12 U1.L7 U1.L13 U1.M12 U1.N7 U1.N13 U1.P8 U1.P12 U1.R7 U1.R13 U6.14 | length 110
  Top Layer w14: v1(4830.72,3057.71) 4831.73,3057.71 4846.54,3072.52 U1.R13@4847.05,3072.52 ; v1@4863.06,3088.54 U1.P12@4878.54,3104.02 ; v1@4894.56,3057.04 U1.N13@4910.04,3072.52 ; v1@4926.06,3088.54 U1.M12@4941.54,3104.02 ; v1@4957.55,3057.04 U1.L13@4973.03,3072.52
  other v1: 4894.56,3056.86 4957.55,3056.86 4863.06,3088.36 4926.06,3088.36
VCC_1V5: L3.2 R3.1 R4.2 U1.A3 U1.D2 U1.E5 U1.G1 U1.H4 U1.L3 U1.P2 U1.R5 U1.U1 U1.V4 U2.A1 U2.A8 U2.B2 U2.C1 U2.C9 U2.D2 U2.D9 U2.E9 U2.F1 U2.G7 U2.H2 U2.H9 U2.K2 U2.K8 U2.N1 U2.N9 U2.R1 U2.R9 U8.14
VCC_1V8: C109.2 C110.2 C141.1 L2.2 R29.2 R30.1 R33.2 R34.1 R39.2 R41.2 R43.2 R45.2 R71.2 U1.A13 U1.B16 U1.C19 U1.D12 U1.E15 U1.F8 U1.F11 U1.F18 U1.G8 U1.G9 U1.H8 U1.H14 U1.J9 U1.J11 U1.J17 U1.K8 U1.K20 U1.L11 U1.M8 U1.M16 U1.N9 U1.N11 U1.N19 U1.P10 U1.R9 U1.R15 U1.T8 U1.T18 U1.U11 U1.V14 U1.W7 U1.W17 U1.Y10 U1.Y20 U7.14 USD1.5 | length 289.8
  Top Layer w10: U1.N19@4910.04,2883.54 4910.76,2882.82 4920.5,2882.82 4935.17,2868.15 4948.85,2868.15 4957.64,2859.36 4957.64,2845.68 4961,2842.32 v1@4961,2826
  Top Layer w14: v1@4674.09,2836.57 U1.Y20@4689.57,2852.05 ; v1@4705.58,2931.06 U1.W17@4721.06,2946.54 ; v1@4737.08,3025.54 U1.V14@4752.56,3041.02 ; v1@4768.58,3120.03 U1.U11@4784.06,3135.51 ; v1@4800.07,2899.56 U1.T18@4815.55,2915.04 ; v1@4831.57,2994.05 U1.R15@4847.05,3009.53 ; v1@4894.56,3120.03 U1.N11@4910.04,3135.51 ; v1@4926.06,2962.55 U1.M16@4941.54,2978.03 ; v1(4957.55,3119.64) 4957.55,3120.03 U1.L11@4973.03,3135.51
  other v1: 4959,2826 4674.09,2836.39 4800.07,2899.38 4705.58,2930.88 4926.06,2962.37 4831.57,2993.87 4737.08,3025.36 4768.58,3119.85 4894.56,3119.85
VCC_3V3: *.8 C113.2 C114.2 C115.2 C116.2 C120.1 C132.1 C133.1 C134.1 C138.1 C139.1 CP1.2 DONE.1 L4.2 LG1.14 P2.1 P2.6 R19.1 R27.2 R35.1 R38.1 R46.1 R47.1 R48.1 R55.1 R57.1 R59.2 R63.1 R68.2 tf1.4 U1.B6 U1.D7 U1.K6 U1.M6 U1.N6 U1.R6 U1.T6 U9.14 U11.5 U11.7 U11.8 U12.5 U12.7 U12.8 U13.4 U14.8 UP1.1 UP1.4 USD1.17 USD1.21 USR_LED.1 X2.1 X2.4
VCC_IN: C140.2 P2.13 P2.14 TU1.5 U6.10 U6.11 U6.12 U6.13 U7.10 U7.11 U7.12 U8.10 U8.11 U8.12 U9.10 U9.11 U9.12
VDD_DIG: C14.1 C15.1 C162.1 C172.1 C173.1 C176.1 C177.1 RX4.2 U5.B8 U5.D2 U5.D3 U5.E3 U5.F12 U5.K4 U12.1 U12.2 | length 44.5
  Top Layer w12: v1(4688.84,2069.16) U5.F12@4704.59,2053.41 ; U5.K4@4830.57,1801.47 v1(4846.32,1785.72)
VDDA_RX_LO: C165.1 C166.1 C168.1 C169.1 C170.1 C171.1 C174.1 C175.1 U5.B9 U5.B10 U5.E2 U5.F2 U5.J3 U5.K3 U11.1 U11.2
VUSB_V_EN: R69.1 TU1.4
pads on no net: LG1. tf1.0 tf1.11 tf1.12 U1.A20 U1.B5 U1.B9 U1.B13 U1.B19 U1.B20 U1.C6 U1.C20 U1.D9 U1.D18 U1.D19 U1.D20 U1.E6 U1.E8 U1.E9 U1.E17 U1.E18 U1.E19 U1.F16 U1.F17 U1.F19 U1.F20 U1.G14 U1.G15 U1.G17 U1.G18 U1.G19 U1.G20 U1.H15 U1.H16 U1.H17 U1.H18 U1.H20 U1.J14 U1.J15 U1.J16 U1.J18 U1.J19 U1.J20 U1.K9 U1.K14 U1.K16 U1.K17 U1.K18 U1.K19 U1.L10 U1.L14 U1.L15 U1.L16 U1.L17 U1.L19 U1.L20 U1.M14 U1.M15 U1.M17 U1.M18 U1.M19 U1.M20 U1.N15 U1.N16 U1.P1 U1.P3 U1.R1 U1.R2 U1.R3 U1.T1 U1.T2 U1.T4 U1.T5 U1.T9 U1.U2 U1.U3 U1.U4 U1.U5 U1.U7 U1.U8 U1.U9 U1.U10 U1.V1 U1.V2 U1.V3 U1.V5 U1.V6 U1.V7 U1.V8 U1.V10 U1.V11 U1.W1 U1.W3 U1.W4 U1.W5 U1.W6 U1.W8 U1.W9 U1.W10 U1.W11 U1.W15 U1.Y1 U1.Y2 U1.Y3 U1.Y4 U1.Y6 U1.Y7 U1.Y8 U1.Y9 U1.Y11 U1.Y12 U1.Y13 U2.J1 U2.J9 U2.L1 U2.L9 U2.M7 U5.A3 U5.B3 U5.B4 U5.B5 U5.B6 U5.B7 U5.C3 U5.L5 U5.M3 U5.M11 UP1.5 USD1.8 USD1.10 USD1.12 USD1.13 USD1.14 USD1.15 X4.1

## Silkscreen, mask and mechanical layers (free items; w line width, h text height)
Top Overlay:
  lines w10: 4297,1037 4297,4974.01 ; 4619,3150 5382,3150 ; 4987.47,2757.5 4987.47,3516.5

## Text inside footprints (layer, text, board x,y; h text height)
DONE: Top Overlay "+" at 14102,4964.14 h30 r90
P2: Top Overlay "1" at 18290,3715 h30 r90; Top Overlay "13" at 18170,3675 h30 r90; Top Overlay "12" at 18270,4975 h30 r90; Top Overlay "24" at 18170,4975 h30 r90
RX1: Mechanical 37 "2" at 13708.15,6029.52 h30 r90; Mechanical 37 "3" at 13708.15,6029.52 h30 r90; Mechanical 37 "4" at 14048.67,6034.74 h30 r90; Mechanical 37 "5" at 14048.67,6034.74 h30 r90; Mechanical 37 "1" at 13877.67,6033.27 h30 r90; Mechanical 39 "200X95B" at 14281.67,6144.5 h30 r90; Mechanical 39 "200X95" at 14221.67,6128.5 h30 r90; Mechanical 39 "200X90" at 14161.67,6128.5 h30 r90; Mechanical 39 "CNSMARAL687W375H171" at 13551.67,6336.5 h30 r90; Top Component Outline "ADI/JRBL" at 13865,5952.03 h30 r180; Top Component Outline "25JUL16" at 13865,5979.63 h30 r180; Top Component Outline "QA/RGS" at 13865,6747.24 h30 r180; Top Component Outline "26JUL16" at 13865,6799.64 h30 r180; Mechanical 43 "PCB EDGE" at 14225,6506.5 h30 r90; Top Assembly "UPN" at 13865,6129.9 h30 r180; Top Assembly "N/A" at 13865,6090.5 h30 r180
RX2: Mechanical 37 "2" at 9003.15,6029.52 h30 r90; Mechanical 37 "3" at 9003.15,6029.52 h30 r90; Mechanical 37 "4" at 9343.67,6034.74 h30 r90; Mechanical 37 "5" at 9343.67,6034.74 h30 r90; Mechanical 37 "1" at 9172.67,6033.27 h30 r90; Mechanical 39 "200X95B" at 9576.67,6144.5 h30 r90; Mechanical 39 "200X95" at 9516.67,6128.5 h30 r90; Mechanical 39 "200X90" at 9456.67,6128.5 h30 r90; Mechanical 39 "CNSMARAL687W375H171" at 8846.67,6336.5 h30 r90; Top Component Outline "ADI/JRBL" at 9160,5952.03 h30 r180; Top Component Outline "25JUL16" at 9160,5979.63 h30 r180; Top Component Outline "QA/RGS" at 9160,6747.24 h30 r180; Top Component Outline "26JUL16" at 9160,6799.64 h30 r180; Mechanical 43 "PCB EDGE" at 9520,6506.5 h30 r90; Top Assembly "UPN" at 9160,6129.9 h30 r180; Top Assembly "N/A" at 9160,6090.5 h30 r180
T1: Mechanical 37 "3" at 14615,6442.5 h30; Mechanical 37 "6" at 14515,6317.5 h30; Mechanical 37 "4" at 14615,6317.5 h30; Mechanical 37 "1" at 14515,6442.51 h30; Mechanical 37 "5" at 14565,6317.51 h30; Mechanical 37 "2" at 14564.99,6442.51 h30; Mechanical 39 "30X65" at 14565,6275.02 h30; Mechanical 39 "TSML150W160H160" at 14565,6810 h30; Top Component Outline "ADI/JSM" at 14365,6456.81 h30 r90; Top Component Outline "04SEP12" at 14414.99,6456.81 h30 r90; Top Component Outline "QA/REP" at 14739.99,6444.41 h30 r90; Top Component Outline "04SEP12" at 14790,6456.81 h30 r90; Top Assembly "N/A" at 14615,6400.01 h30 r90; Top Assembly "UPN" at 14639.99,6400.01 h30 r90
T2: Mechanical 37 "3" at 9910,6442.5 h30; Mechanical 37 "6" at 9810,6317.5 h30; Mechanical 37 "4" at 9910,6317.5 h30; Mechanical 37 "1" at 9810,6442.51 h30; Mechanical 37 "5" at 9860,6317.51 h30; Mechanical 37 "2" at 9859.99,6442.51 h30; Mechanical 39 "30X65" at 9860,6275.02 h30; Mechanical 39 "TSML150W160H160" at 9860,6810 h30; Top Component Outline "ADI/JSM" at 9660,6456.81 h30 r90; Top Component Outline "04SEP12" at 9709.99,6456.81 h30 r90; Top Component Outline "QA/REP" at 10034.99,6444.41 h30 r90; Top Component Outline "04SEP12" at 10085,6456.81 h30 r90; Top Assembly "N/A" at 9910,6400.01 h30 r90; Top Assembly "UPN" at 9934.99,6400.01 h30 r90
T3: Mechanical 37 "3" at 11040,6442.5 h30; Mechanical 37 "6" at 10940,6317.5 h30; Mechanical 37 "4" at 11040,6317.5 h30; Mechanical 37 "1" at 10940,6442.51 h30; Mechanical 37 "5" at 10990,6317.51 h30; Mechanical 37 "2" at 10989.99,6442.51 h30; Mechanical 39 "30X65" at 10990,6275.02 h30; Mechanical 39 "TSML150W160H160" at 10990,6810 h30; Top Component Outline "ADI/JSM" at 10790,6456.81 h30 r90; Top Component Outline "04SEP12" at 10839.99,6456.81 h30 r90; Top Component Outline "QA/REP" at 11164.99,6444.41 h30 r90; Top Component Outline "04SEP12" at 11215,6456.81 h30 r90; Top Assembly "N/A" at 11040,6400.01 h30 r90; Top Assembly "UPN" at 11064.99,6400.01 h30 r90
T4: Mechanical 37 "3" at 15730,6442.5 h30; Mechanical 37 "6" at 15630,6317.5 h30; Mechanical 37 "4" at 15730,6317.5 h30; Mechanical 37 "1" at 15630,6442.51 h30; Mechanical 37 "5" at 15680,6317.51 h30; Mechanical 37 "2" at 15679.99,6442.51 h30; Mechanical 39 "30X65" at 15680,6275.02 h30; Mechanical 39 "TSML150W160H160" at 15680,6810 h30; Top Component Outline "ADI/JSM" at 15480,6456.81 h30 r90; Top Component Outline "04SEP12" at 15529.99,6456.81 h30 r90; Top Component Outline "QA/REP" at 15854.99,6444.41 h30 r90; Top Component Outline "04SEP12" at 15905,6456.81 h30 r90; Top Assembly "N/A" at 15730,6400.01 h30 r90; Top Assembly "UPN" at 15754.99,6400.01 h30 r90
TX1: Mechanical 37 "2" at 11613.15,6029.52 h30 r90; Mechanical 37 "3" at 11613.15,6029.52 h30 r90; Mechanical 37 "4" at 11953.67,6034.74 h30 r90; Mechanical 37 "5" at 11953.67,6034.74 h30 r90; Mechanical 37 "1" at 11782.67,6033.27 h30 r90; Mechanical 39 "200X95B" at 12186.67,6144.5 h30 r90; Mechanical 39 "200X95" at 12126.67,6128.5 h30 r90; Mechanical 39 "200X90" at 12066.67,6128.5 h30 r90; Mechanical 39 "CNSMARAL687W375H171" at 11456.67,6336.5 h30 r90; Top Component Outline "ADI/JRBL" at 11770,5952.03 h30 r180; Top Component Outline "25JUL16" at 11770,5979.63 h30 r180; Top Component Outline "QA/RGS" at 11770,6747.24 h30 r180; Top Component Outline "26JUL16" at 11770,6799.64 h30 r180; Mechanical 43 "PCB EDGE" at 12130,6506.5 h30 r90; Top Assembly "UPN" at 11770,6129.9 h30 r180; Top Assembly "N/A" at 11770,6090.5 h30 r180
TX2: Mechanical 37 "2" at 16308.15,6029.52 h30 r90; Mechanical 37 "3" at 16308.15,6029.52 h30 r90; Mechanical 37 "4" at 16648.67,6034.74 h30 r90; Mechanical 37 "5" at 16648.67,6034.74 h30 r90; Mechanical 37 "1" at 16477.67,6033.27 h30 r90; Mechanical 39 "200X95B" at 16881.67,6144.5 h30 r90; Mechanical 39 "200X95" at 16821.67,6128.5 h30 r90; Mechanical 39 "200X90" at 16761.67,6128.5 h30 r90; Mechanical 39 "CNSMARAL687W375H171" at 16151.67,6336.5 h30 r90; Top Component Outline "ADI/JRBL" at 16465,5952.03 h30 r180; Top Component Outline "25JUL16" at 16465,5979.63 h30 r180; Top Component Outline "QA/RGS" at 16465,6747.24 h30 r180; Top Component Outline "26JUL16" at 16465,6799.64 h30 r180; Mechanical 43 "PCB EDGE" at 16825,6506.5 h30 r90; Top Assembly "UPN" at 16465,6129.9 h30 r180; Top Assembly "N/A" at 16465,6090.5 h30 r180
U5: Top Overlay "A" at 4539.62,1660.96 h30 r270; Top Overlay "1" at 4494.62,1696.96 h30
U6: Bottom Component Center "9" at 8708.3,5382.6 h30; Bottom Component Center "14" at 8629.5,5334.3 h30; Bottom Component Center "12" at 8658.1,5382.6 h30; Bottom Component Center "11" at 8677.8,5382.6 h30; Bottom Component Center "10" at 8697.4,5382.6 h30; Bottom Component Center "13" at 8629.5,5354 h30; Bottom Component Center "5" at 8736.9,5295 h30; Bottom Component Center "6" at 8736.9,5314.7 h30; Bottom Component Center "8" at 8736.9,5354 h30; Bottom Component Center "7" at 8736.9,5334.3 h30; Bottom Component Center "16" at 8629.5,5295 h30; Bottom Component Center "15" at 8629.5,5314.7 h30; Bottom Component Center "20" at 8687.6,5324.5 h30; Bottom Component Center "1" at 8649.3,5266.4 h30; Bottom Component Center "2" at 8669,5266.4 h30; Bottom Component Center "3" at 8688.6,5266.4 h30; Bottom Component Center "4" at 8708.3,5266.4 h30
U7: Bottom Component Center "9" at 8923.3,5382.6 h30; Bottom Component Center "14" at 8844.5,5334.3 h30; Bottom Component Center "12" at 8873.1,5382.6 h30; Bottom Component Center "11" at 8892.8,5382.6 h30; Bottom Component Center "10" at 8912.4,5382.6 h30; Bottom Component Center "13" at 8844.5,5354 h30; Bottom Component Center "5" at 8951.9,5295 h30; Bottom Component Center "6" at 8951.9,5314.7 h30; Bottom Component Center "8" at 8951.9,5354 h30; Bottom Component Center "7" at 8951.9,5334.3 h30; Bottom Component Center "16" at 8844.5,5295 h30; Bottom Component Center "15" at 8844.5,5314.7 h30; Bottom Component Center "20" at 8902.6,5324.5 h30; Bottom Component Center "1" at 8864.3,5266.4 h30; Bottom Component Center "2" at 8884,5266.4 h30; Bottom Component Center "3" at 8903.6,5266.4 h30; Bottom Component Center "4" at 8923.3,5266.4 h30
U8: Bottom Component Center "9" at 8148.3,5382.6 h30; Bottom Component Center "14" at 8069.5,5334.3 h30; Bottom Component Center "12" at 8098.1,5382.6 h30; Bottom Component Center "11" at 8117.8,5382.6 h30; Bottom Component Center "10" at 8137.4,5382.6 h30; Bottom Component Center "13" at 8069.5,5354 h30; Bottom Component Center "5" at 8176.9,5295 h30; Bottom Component Center "6" at 8176.9,5314.7 h30; Bottom Component Center "8" at 8176.9,5354 h30; Bottom Component Center "7" at 8176.9,5334.3 h30; Bottom Component Center "16" at 8069.5,5295 h30; Bottom Component Center "15" at 8069.5,5314.7 h30; Bottom Component Center "20" at 8127.6,5324.5 h30; Bottom Component Center "1" at 8089.3,5266.4 h30; Bottom Component Center "2" at 8109,5266.4 h30; Bottom Component Center "3" at 8128.6,5266.4 h30; Bottom Component Center "4" at 8148.3,5266.4 h30
U9: Bottom Component Center "9" at 7763.3,5382.6 h30; Bottom Component Center "14" at 7684.5,5334.3 h30; Bottom Component Center "12" at 7713.1,5382.6 h30; Bottom Component Center "11" at 7732.8,5382.6 h30; Bottom Component Center "10" at 7752.4,5382.6 h30; Bottom Component Center "13" at 7684.5,5354 h30; Bottom Component Center "5" at 7791.9,5295 h30; Bottom Component Center "6" at 7791.9,5314.7 h30; Bottom Component Center "8" at 7791.9,5354 h30; Bottom Component Center "7" at 7791.9,5334.3 h30; Bottom Component Center "16" at 7684.5,5295 h30; Bottom Component Center "15" at 7684.5,5314.7 h30; Bottom Component Center "20" at 7742.6,5324.5 h30; Bottom Component Center "1" at 7704.3,5266.4 h30; Bottom Component Center "2" at 7724,5266.4 h30; Bottom Component Center "3" at 7743.6,5266.4 h30; Bottom Component Center "4" at 7763.3,5266.4 h30
U13: Bottom Component Center "3" at 7499,2635.1 h30; Bottom Component Center "4" at 7424,2635.1 h30; Bottom Component Center "1" at 7424,2552.5 h30; Bottom Component Center "2" at 7499,2552.5 h30
U14: Bottom Component Center "5" at 15440,5049.95 h30 r90; Bottom Component Center "2" at 15340,4734.95 h30 r90; Bottom Component Center "1" at 15290,4734.95 h30 r90; Bottom Component Center "4" at 15440,4734.95 h30 r90; Bottom Component Center "8" at 15290,5049.95 h30 r90; Bottom Component Center "7" at 15340,5049.95 h30 r90; Bottom Component Center "3" at 15390,4734.95 h30 r90; Bottom Component Center "6" at 15390,5049.95 h30 r90
USR_LED: Top Overlay "+" at 14392,4954.14 h30 r90